# EAGLE board week 6 electronic (EAGLE 7.4.0)
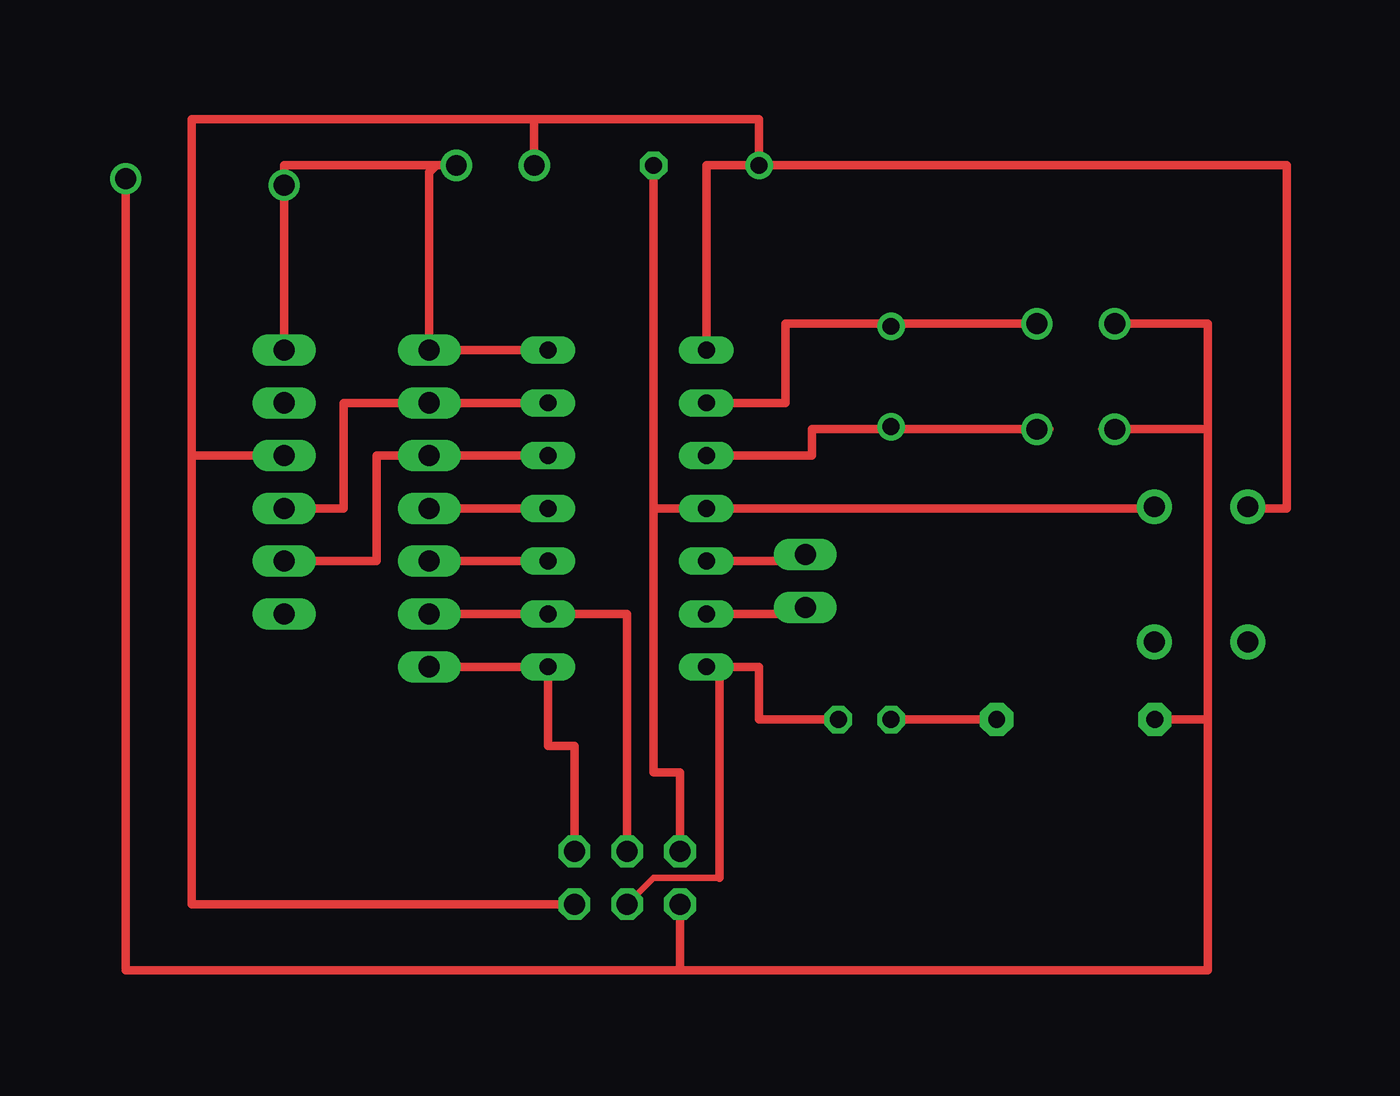
[diagram p0: board, top side]
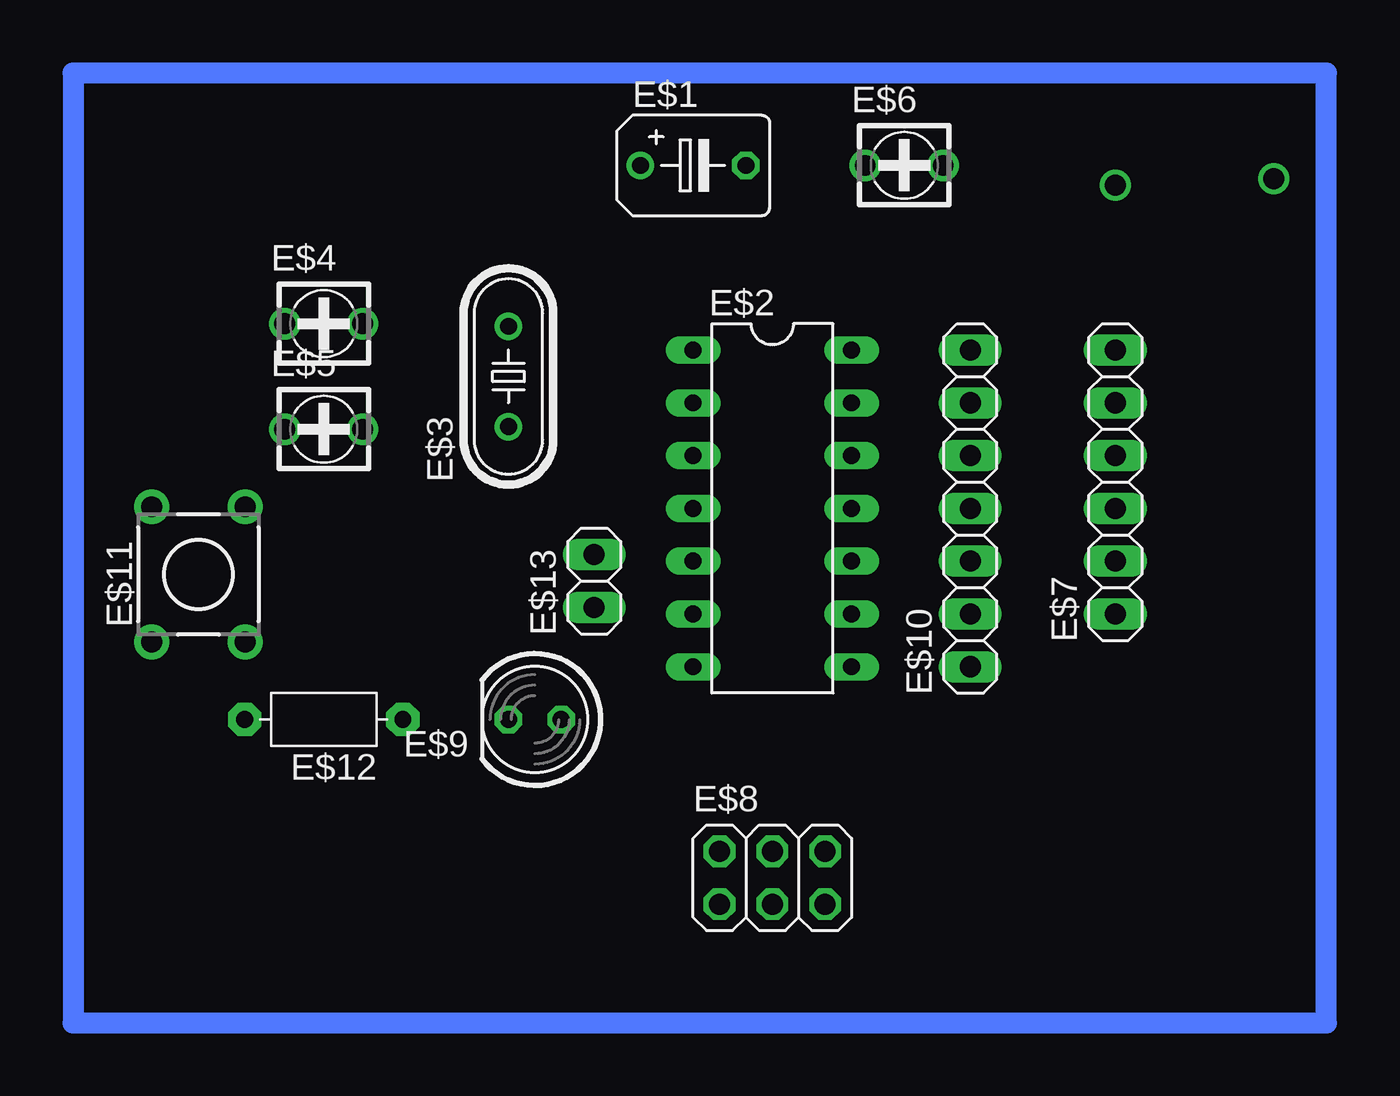
[diagram p1: board, bottom side, seen from below]

No outline drawn. Coordinates in mm, seen from the top.
Copper layers (1*16): Top 0.035mm / dielectric 1.5mm / Bottom 0.035mm
Design rules "default": minimum track width 10mil, minimum drill 24mil, track to track 8mil, track to pad 8mil, pad to pad 8mil, via to via 8mil, smd to smd 8mil, copper to edge 40mil, drill to drill 8mil, minimum pad ring 10mil, minimum via ring 8mil, stop-mask expansion 4mil, vias tented up to drill 0mil, thermal gap 10mil

## Footprints (pad centres in the part's own frame; a part is rotated, then mirrored left to right if it is on the bottom)
B45181B = drill 0.813: + -2.54,0 | drill 0.813 octagon: - 2.54,0
DIL14 = drill 0.813 long: 1 -7.62,-3.81; 2 -5.08,-3.81; 3 -2.54,-3.81; 4 0,-3.81; 5 2.54,-3.81; 6 5.08,-3.81; 7 7.62,-3.81; 8 7.62,3.81; 9 5.08,3.81; 10 2.54,3.81; 11 0,3.81; 12 -2.54,3.81; 13 -5.08,3.81; 14 -7.62,3.81
HC49/S = drill 0.813: 1 -2.413,0; 2 2.413,0
3008 = drill 1: + -1.875,0; - 1.875,0
1X06 = drill 1.016 long: 1 -6.35,0; 2 -3.81,0; 3 -1.27,0; 4 1.27,0; 5 3.81,0; 6 6.35,0
2X03 = drill 1.016 octagon: 1 -2.54,-1.27; 2 -2.54,1.27; 3 0,-1.27; 4 0,1.27; 5 2.54,-1.27; 6 2.54,1.27
LED5MM = drill 0.813 octagon: A -1.27,0; K 1.27,0
1X07 = drill 1.016 long: 1 -7.62,0; 2 -5.08,0; 3 -2.54,0; 4 0,0; 5 2.54,0; 6 5.08,0; 7 7.62,0
TL1105 = drill 1 pad 1.676: 1 -2.25,3.25; 2 2.25,3.25; 3 -2.25,-3.25; 4 2.25,-3.25
R-7,5 = drill 0.813 pad 1.6 octagon: 1 -3.81,0; 2 3.81,0
1X02 = drill 1.016 long: 1 -1.27,0; 2 1.27,0

## Placement (x,y rotation side)
E$1  [B45181B]  31.11,41.59 0 bottom
E$2  [DIL14]  27.3,25.08 270 bottom
E$3  [HC49/S]  40.01,31.43 90 bottom
E$4  [3008]  48.9,33.97 0 bottom
E$5  [3008]  48.9,28.89 0 bottom
E$6  [3008]  20.95,41.59 0 bottom
E$7  [1X06]  10.79,26.35 90 bottom
E$8  [2X03]  27.3,7.3 0 bottom
E$9  [LED5MM]  38.73,14.92 180 bottom
E$10  [1X07]  17.78,25.08 90 bottom
E$11  [TL1105]  54.93,21.91 0 bottom
E$12  [R-7,5]  48.9,14.92 180 bottom
E$13  [1X02]  35.88,21.59 90 bottom

## Library data of the parts
E$1 = rcl
E$2 = 40xx
E$3 = crystal
E$4-E$6 = c-trimm
E$7 E$8 E$10 E$13 = pinhead
E$9 = led
E$11 = switch
E$12 = discrete

## Nets
S$1: E$2.9 E$8.4 E$10.2
S$2: E$1.- E$2.4 E$8.2
S$3: E$2.13 E$7.3
S$4: E$2.12 E$7.2
S$5: E$10.4
S$6: E$2.8 E$8.6
S$7: E$2.10
S$8: E$1.+ E$2.1 E$6.+ E$7.4 E$8.5
S$9: E$9.K E$12.1
S$10: E$7.6 E$10.7
S$12: E$8.1 E$12.2
S$13: E$2.2
S$14: E$2.14
S$15: E$2.3
S$16: E$10.1
S$17: E$2.5 E$13.2
S$18: E$2.6 E$13.1
S$20: E$2.7 E$8.3 E$9.A

## Tracks (layer width: path | path; a pad name or v marks a point on that pad's centre or on a via)
S$1
  Top 0.406: E$8.4 27.3,20 E$2.9 E$10.2
S$2
  Top 0.406: E$8.2 29.84,12.38 28.57,12.38 28.57,25.08 | 28.57,25.08 E$1.- | 28.57,25.08 E$2.4 52.39,25.08
S$3
  Top 0.406: E$2.13 13.65,30.16 13.65,25.08 E$7.3
S$4
  Top 0.406: E$2.12 15.24,27.62 15.24,22.54 E$7.2
S$5
  Top 0.406: 23.81,25.08 E$10.4
S$6
  Top 0.406: E$8.6 24.77,13.65 23.5,13.65 E$2.8
S$7
  Top 0.406: E$2.10 17.46,22.54
S$8
  Top 0.406: 6.35,27.62 6.35,6.03 E$8.5 | E$7.4 6.35,27.62 | 6.35,27.62 6.35,43.81 22.83,43.81 | 22.83,43.81 E$6.+ | 22.83,43.81 33.66,43.81 E$1.+ | E$1.+ 59.05,41.59 59.05,25.08 57.47,25.08 | E$2.1 31.11,41.59 E$1.+
S$9
  Top 0.406: E$12.1 E$9.K
S$10  (via drill 1)
  Top 0.406: 18.41,41.59 18.1,41.59 | 18.1,41.59 10.79,41.59 v10.79,40.64 E$7.6 | E$10.7 17.78,41.27 18.1,41.59
S$12  (via drill 1)
  Top 0.406: 55.24,28.89 55.24,33.97 51.44,33.97 | 55.24,28.89 55.24,14.92 | 55.24,14.92 55.24,2.86 29.84,2.86 | E$8.1 29.84,2.86 | 55.24,14.92 E$12.2 | 29.84,2.86 3.17,2.86 v3.17,40.96 | 55.24,28.89 50.16,28.89
S$13
  Top 0.406: 46.35,33.97 34.92,33.97 34.92,30.16 E$2.2
S$14
  Top 0.406: E$2.14 17.81,32.7
S$15
  Top 0.406: 47.62,28.89 36.2,28.89 36.2,27.62 E$2.3
S$16
  Top 0.406: 23.18,17.46 E$10.1
S$17
  Top 0.406: E$2.5 35.56,22.54 E$13.2
S$18
  Top 0.406: E$2.6 35.56,20 E$13.1
S$19
  Bottom 1.016: 0.64,0.32 0.64,46.04 60.96,46.04 60.96,0.32 0.64,0.32
S$20
  Top 0.305: 31.75,7.3 28.57,7.3 E$8.3
  Top 0.406: E$9.A 33.66,14.92 33.66,17.46 31.75,17.46 | 31.75,17.46 E$2.7 | 31.75,7.3 31.75,17.46